# Altium PCB shop roaster psu module board 1.PcbDoc
Units mm, origin at the board's own origin, x right, y up, seen from the top; angles counter-clockwise.
Board outline 152.4 x 101.6 mm, 2 copper layers (Top Layer, Bottom Layer); 21 components, 11 nets, 86 pads, 4 vias.
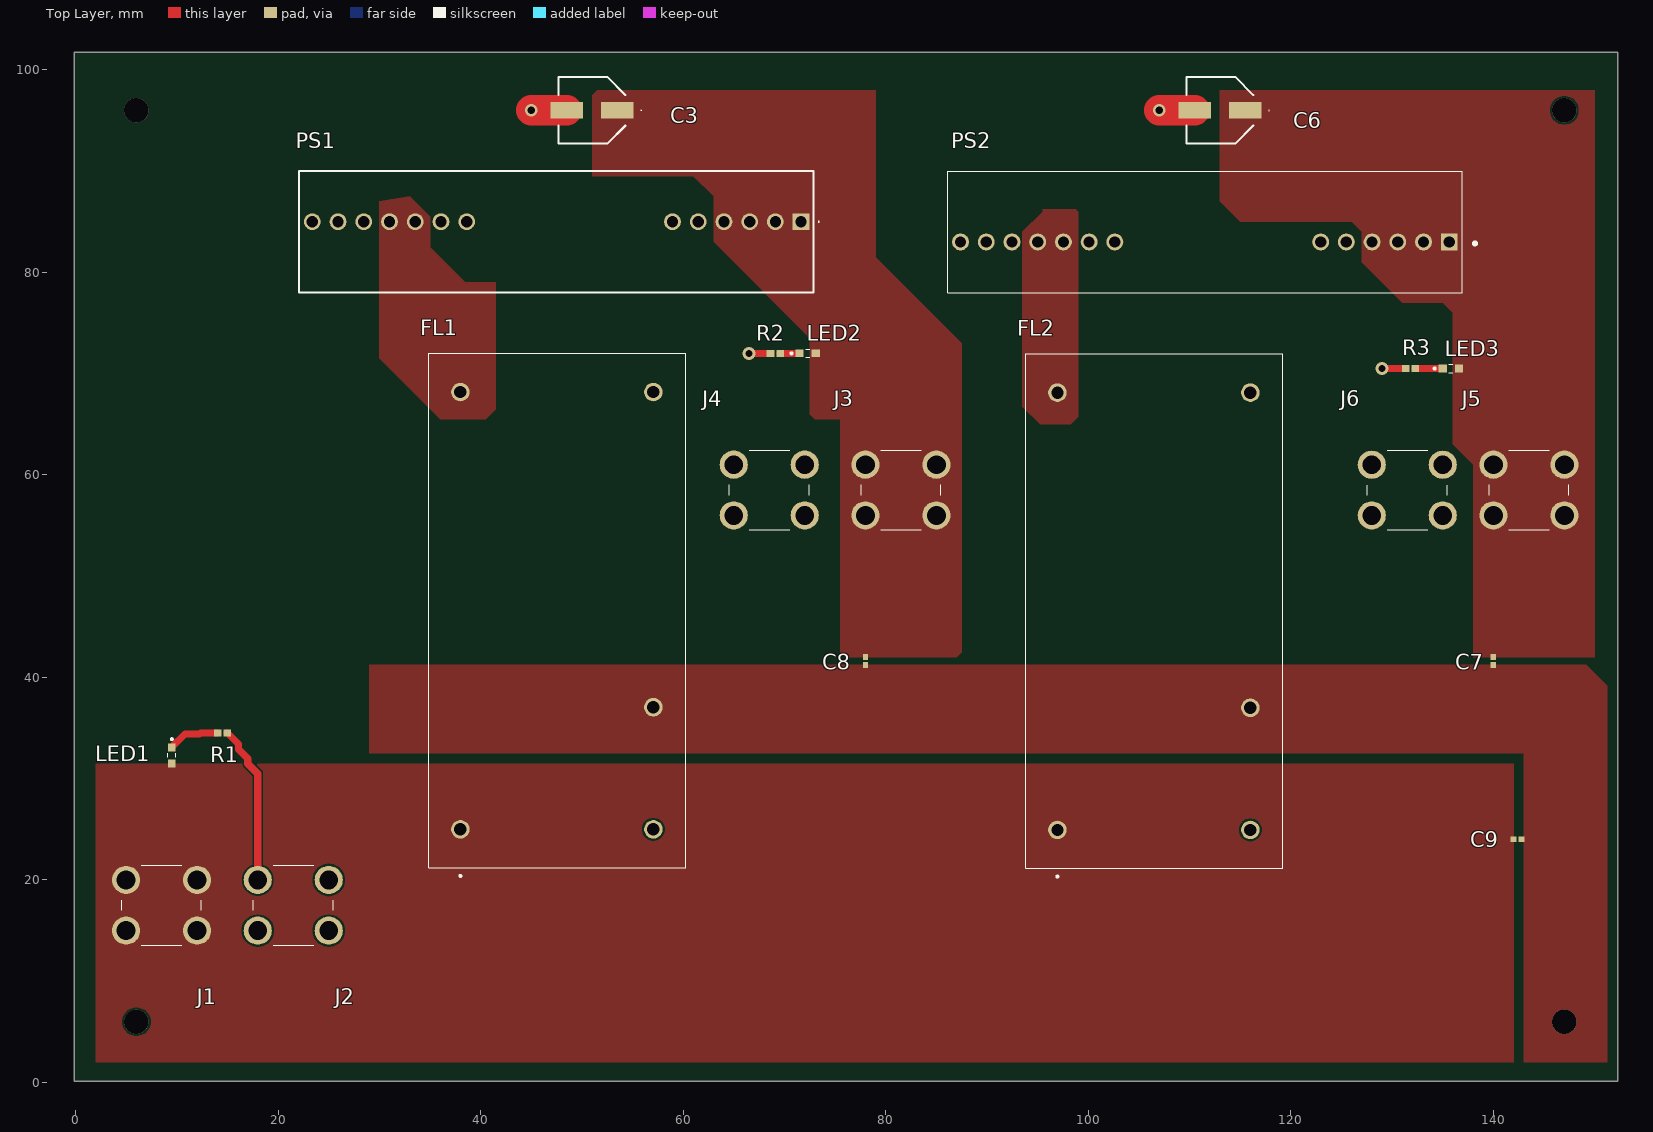
[diagram p0: Top Layer view]
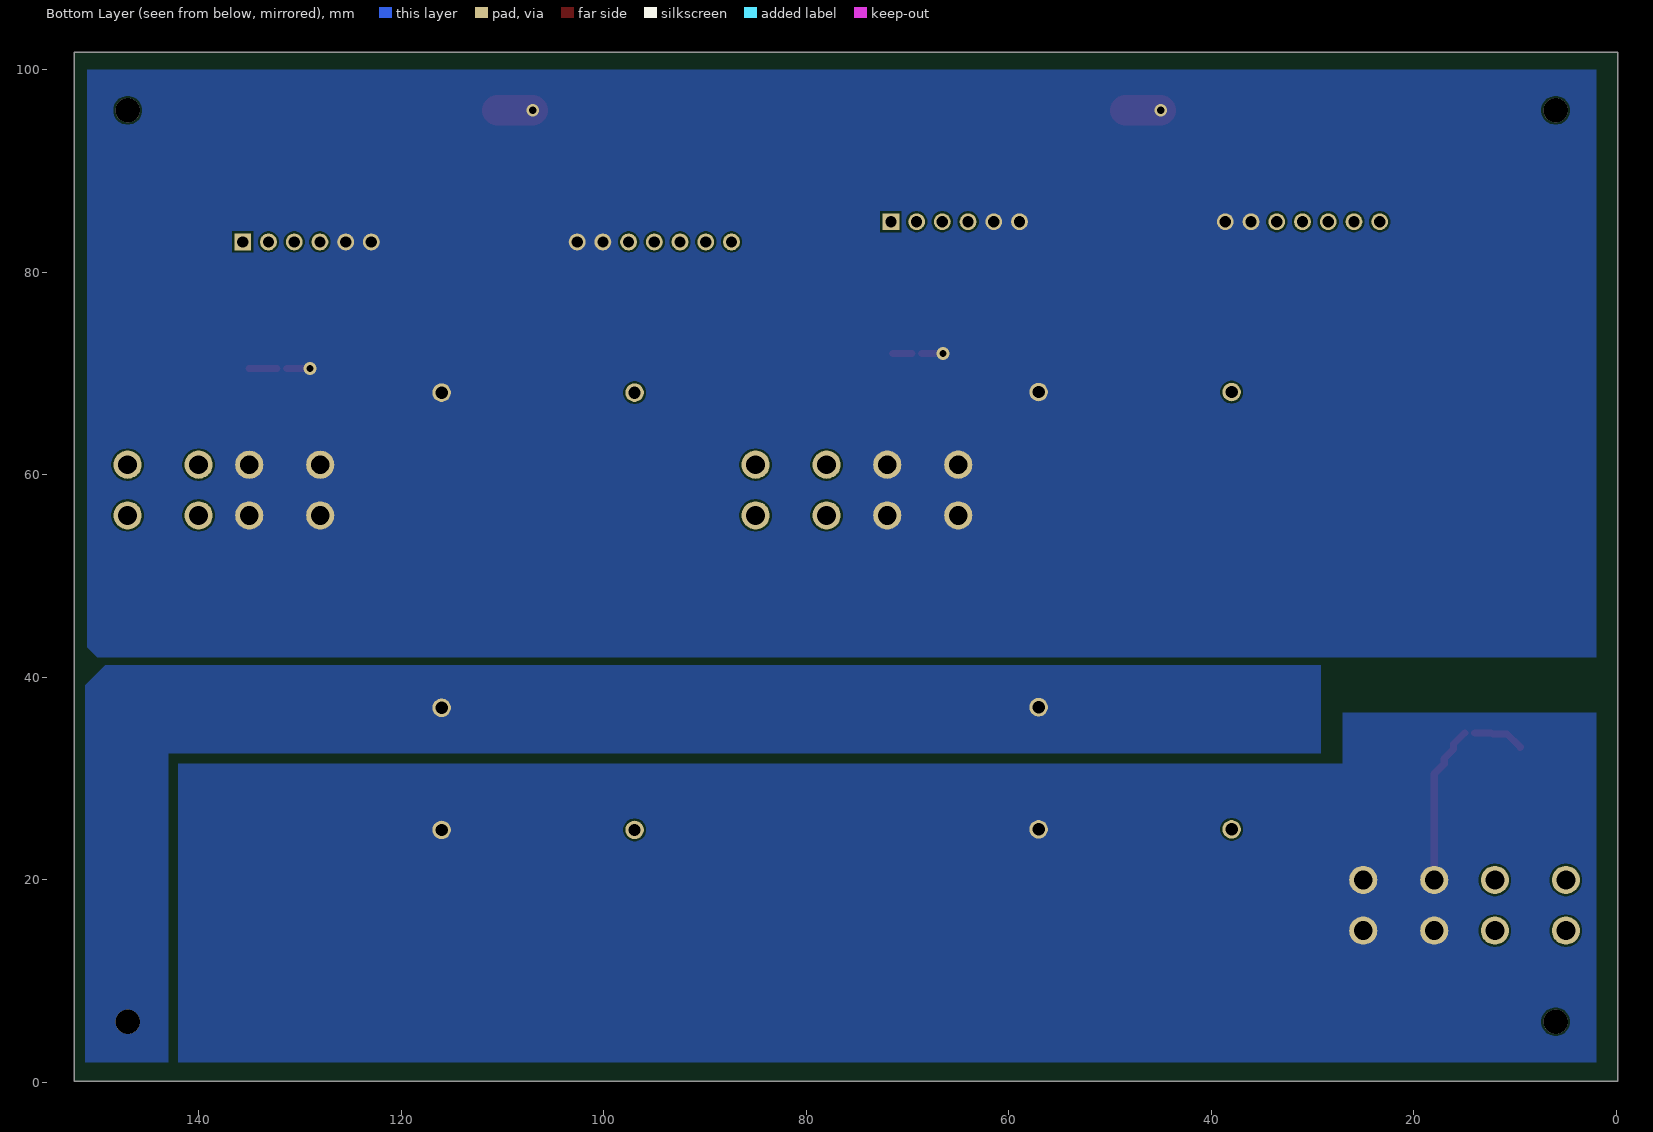
[diagram p1: Bottom Layer view, seen from below]
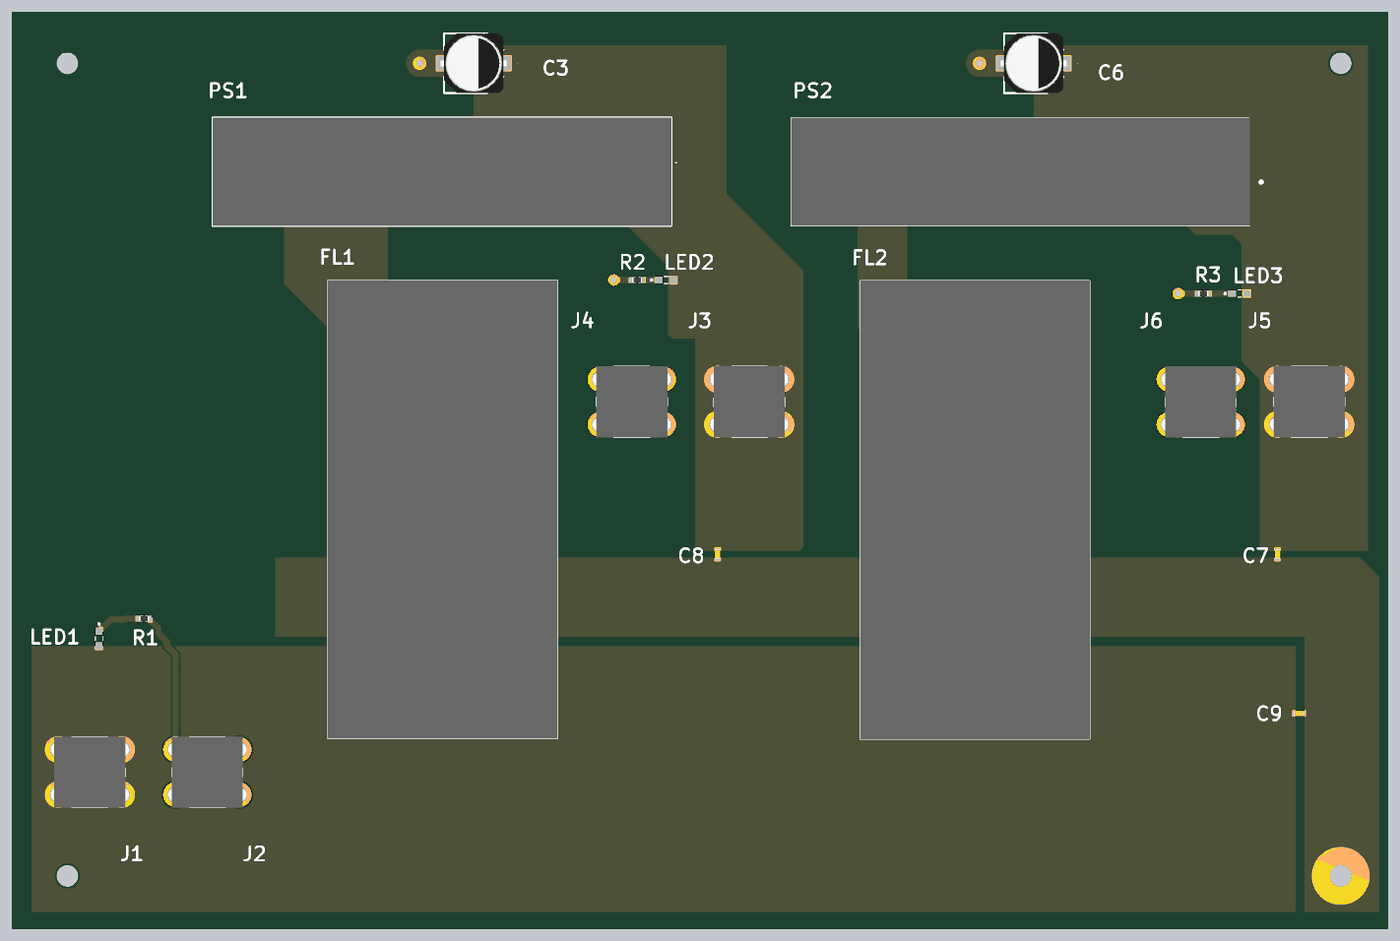
[diagram p2: 3D render of the assembled board from above, using the file's embedded part models]

## Layer stack, top to bottom
Top Solder: solder mask 0.0102, Solder Resist, Dk 3.5
Top Layer: signal copper 0.0356
Dielectric 1: dielectric 0.32, FR-4, Dk 4.8
Bottom Layer: signal copper 0.0356
Bottom Solder: solder mask 0.0102, Solder Resist, Dk 3.5

## Board outline
-0.127,0.127 152.273,0.127 152.273,101.727 -0.127,101.727

## Design rules (kind name [scope] priority, off if disabled: settings)
Clearance [All] p1: gap=0.2 ignorepadtopadclearanceinfootprint=FALSE
PlaneConnect [All] p1: planeconnectstyle=Direct reliefexpansion=0.508 reliefentries=4 reliefconductorwidth=0.254 reliefairgap=0.254
PolygonConnect [All] p1: connectstyle=Direct reliefconductorwidth=0.254 reliefentries=4 polygonreliefangle="90 Angle" airgapwidth=0.254
RoutingVias [All] p1: holewidth=0.711 width=1.27 viastyle="Through Hole" minholewidth=0.711 minwidth=1.27 maxholewidth=0.711 maxwidth=1.27
SolderMaskExpansion [All] p1: expansion=0.102 istentingtop=FALSE
Width [All] p1: maxlimit=5 minlimit=0.5 preferedwidth=3 minimp=50.000000 maximp=50.000000 favimp=50.000000
29 further rules are at their usual default settings.

## Components (designator, comment, footprint, x,y, rotation, side; value= is the part's Value field where it differs from the comment)
C3 "EEE-FK1J220XP" EEE0JA331XP 51,96 r180 top
C6 "EEE-FK1J220XP" EEE0JA331XP 113,96 r180 top
C7 "Capacitor 0.1 uF +/- 5% 16 V 0402" CAPC1005X56X25LL10T15 140,41.61 r90 top value=100nF
C8 "Capacitor 0.1 uF +/- 5% 16 V 0402" CAPC1005X56X25LL10T15 78,41.61 r90 top value=100nF
C9 "Capacitor 0.1 uF +/- 5% 16 V 0402" CAPC1005X56X25LL10T15 142.39,24 r180 top value=100nF
FL1 "VFM-10A" VFM10A 38,25 r90 top
FL2 "VFM-10A" VFM10A 96.95,24.94 r90 top
J1 "8191-2" 81912 12,20.004 r270 top
J2 "8191-2" 81912 25,20.004 r270 top
J3 "8191-2" 81912 77.99,56 r90 top
J4 "8191-2" 81912 64.99,56 r90 top
J5 "8191-2" 81912 140,56 r90 top
J6 "8191-2" 81912 127.99,55.996 r90 top
LED1 "150060RS55040" 150060RS55040 9.5,32.3 r270 top
LED2 "150060RS55040" 150060RS55040 72.29,72 r0 top
LED3 "150060RS55040" 150060RS55040 135.8,70.5 r0 top
PS1 "NID100-24" NID10024 71.64,85 r180 top
PS2 "NID100-12" NID10012 135.64,83 r180 top
R1 "Resistor 15k +/-1% 0402 63 mW" RESC1005X40X25ML10T10 14.5,34.5 r180 top value=15k
R2 "Resistor 15k +/-1% 0402 63 mW" RESC1005X40X25ML10T10 69.09,72 r0 top value=15k
R3 "Resistor 15k +/-1% 0402 63 mW" RESC1005X40X25ML10T10 131.8,70.5 r0 top value=15k

## Footprints (in the part's own frame and the unit in brackets; to place one, negate y for a bottom-side part, rotate by r counter-clockwise, add the part's x,y. Pads: shape width x height; smd on the part's side, far side on the other; paste and mask are expansions set on the pad)
81912 [mil]
  round 109.49 hole 73: 1(0,0) 2(197.01,0) 3(0,-275.99) 4(197.01,-275.99)
  silkscreen extent -56,-293 254,17, body extent -394,-133 394,133, height 228
150060RS55040 [mm]
  rect 0.8x0.75 smd: 1(-0.8,0) 2(0.8,0)
  silkscreen extent -1.7,-0.4 0.2,0.4
CAPC1005X56X25LL10T15 [mm] "Chip Capacitor, 2-Leads, Body 1.10x0.60mm, IPC High Density"
  rect 0.58x0.54 smd: 1(-0.39,0) 2(0.39,0)
  body extent -0.55,-0.3 0.55,0.3, height 0.56
EEE0JA331XP [mm]
  rect 3.2x1.6 smd: 1(-2.5,0) 2(2.5,0)
  silkscreen extent -4.88,-3.3 3.3,3.3, body extent -3.65,-3.3 3.65,3.3, height 7.7
NID10012 [mm]
  rect 1.665x1.665 hole 1.11: 1(0,0)
  round 1.665 hole 1.11: 2(2.54,0) 3(5.08,0) 4(7.62,0) 5(10.16,0) 6(12.7,0) 7(33.02,0) 8(35.56,0) 9(38.1,0) 10(40.64,0) 11(43.18,0) 12(45.72,0) 13(48.26,0)
  silkscreen extent -2.69,-7 49.53,5, body extent -1.27,-7 49.53,5, height 27.6
NID10024 [mm]
  rect 1.665x1.665 hole 1.11: 1(0,0)
  round 1.665 hole 1.11: 2(2.54,0) 3(5.08,0) 4(7.62,0) 5(10.16,0) 6(12.7,0) 7(33.02,0) 8(35.56,0) 9(38.1,0) 10(40.64,0) 11(43.18,0) 12(45.72,0) 13(48.26,0)
  silkscreen extent -1.8,-5 49.56,7, body extent -1.24,-5 49.56,7, height 27.6
RESC1005X40X25ML10T10 [mm] "Chip Resistor, 2-Leads, Body 1.1x0.6mm, IPC Low Density"
  rect 0.75x0.7 smd: 1(-0.475,0) 2(0.475,0)
  body extent -0.55,-0.27 0.55,0.28, height 0.4
VFM10A [mm]
  round 1.83 hole 1.22: 1(0,0) 2(0,-19.05) 3(43.18,0) 4(43.18,-19.05) 5(12.06,-19.05)
  silkscreen extent -4.7,-22.25 47,3.15, body extent -3.8,-22.25 47,3.15, height 11.8

## Part data
C3 C6: "Capacitor Polarised", Manufacturer_Name=Panasonic, Mouser Part Number=667-EEE-FK1J220XP, Arrow Part Number=EEE-FK1J220XP, Arrow Price/Stock=https://www.arrow.com/en/products/eeefk1j220xp/panasonic, Datasheet Link=http://industrial.panasonic.com/cdbs/www-data/pdf/RDE0000/ABA0000C1181.pdf, Height=7.8mm, Manufacturer_Part_Number=EEE-FK1J220XP, Mouser Price/Stock=https://www.mouser.co.uk/ProductDetail/Panasonic/EEE-FK1J220XP?qs=qE6bgDGEOCtReXDhLMMdtw%3D%3D
C7 C8 C9: library part CMP-001-00001-6, "Chip Capacitor, 0.1 uF, +/- 5%, 16 V, 0402 (1005 Metric)", Capacitor Type=Ceramic, Case/Package=0402, Max Operating Temperature=125°C, Min Operating Temperature=-55°C, Tolerance=5%, Voltage Rating=16V, Mounting Technology=SM, Pins=2, ROHS COMPLIANT=True
FL1 FL2: library part CMP-002-000003-1, "Power Line Filters 0-75Vin 10A DC EMI Filter", Manufacturer_Name="CUI Inc.", Mouser Part Number=490-VFM-10A, Arrow Part Number=VFM-10A, Arrow Price/Stock=https://www.arrow.com/en/products/vfm-10a/cui-inc, Datasheet Link=https://www.cui.com/product/resource/vfm-xx.pdf, Design Item ID=VFM-10A, Height=11.7mm, Manufacturer_Part_Number=VFM-10A, Mouser Price/Stock=https://www.mouser.co.uk/ProductDetail/CUI-Inc/VFM-10A?qs=WyjlAZoYn52c0yYVx%252BhHOQ%3D%3D, Source=SamacSys.SchLib
J1 J2 J3 J4 J5 J6: library part CMP-002-000000-1, "Keystone, Brass Screw Terminal, 22  14 AWG, 15A", Manufacturer_Name="Keystone Electronics", Mouser Part Number=534-8191-2, Design Item ID=8191-2, Geometry.Height=11.176mm, Manufacturer_Part_Number=8191-2, Mouser Price/Stock=https://www.mouser.co.uk/ProductDetail/Keystone-Electronics/8191-2?qs=zBlGwAMnvtcLi4%252BTp6EI2A%3D%3D, Source=8191-2.SchLib
LED1 LED2 LED3: "LED", Manufacturer_Name="Wurth Elektronik", Mouser Part Number=710-150060RS55040, Datasheet Link=http://katalog.we-online.de/led/datasheet/150060RS55040.pdf, Height=0mm, Manufacturer_Part_Number=150060RS55040, Mouser Price/Stock=https://www.mouser.co.uk/ProductDetail/Wurth-Elektronik/150060RS55040?qs=8Aam6%252B7C6HHnMZFlrlTntA%3D%3D
PS1: "Power Supply", Manufacturer_Name="Mean Well", Mouser Part Number=709-NID100-24, Arrow Part Number=NID100-24, Arrow Price/Stock=https://www.arrow.com/en/products/nid100-24/mean-well-enterprises?region=nac, Datasheet Link=https://www.meanwellusa.com/webapp/product/search.aspx?prod=NID100#1, Height=27.5mm, Manufacturer_Part_Number=NID100-24, Mouser Price/Stock=https://www.mouser.co.uk/ProductDetail/MEAN-WELL/NID100-24?qs=u16ybLDytRYj3KEXttNRbg%3D%3D
PS2: "Power Supply", Manufacturer_Name="Mean Well", Mouser Part Number=709-NID100-12, Arrow Part Number=NID100-12, Arrow Price/Stock=https://www.arrow.com/en/products/nid100-12/mean-well-enterprises?region=nac, Datasheet Link=https://www.meanwell-web.com/content/files/pdfs/productPdfs/MW/NID100/NID100-spec.pdf, Height=27.5mm, Manufacturer_Part_Number=NID100-12, Mouser Price/Stock=https://www.mouser.co.uk/ProductDetail/MEAN-WELL/NID100-12?qs=u16ybLDytRakdcW8%2FWhQZg%3D%3D
R1 R2 R3: library part CMP-009-00026-5, "Chip Resistor, 15 KOhm, +/- 1%, 0.063 W, -55 to 155 degC, 0402 (1005 Metric)", Case/Package=0402, Max Operating Temperature=155°C, Min Operating Temperature=-55°C, Power=63mW, Tolerance=1%, Mounting Technology=SM, Pins=2, ROHS COMPLIANT=True

## Free pads (board coordinates)
  round 2.4 hole 2.4 unplated mask+0: MH(6,6) MH(6,96) MH(147,96)
  round 2.4 hole 2.4 mask+2: MH(147,6)

## Via types
v1: diameter 1.27, hole 0.711, Top Layer to Bottom Layer, 4 vias

## Nets (pads, with @x,y where several pads share a name; then routed paths per layer and width w, separated by ;. In a path a pad name is that pad's centre, name@x,y a point inside that pad or via, vN(x,y) a via of type N, cw(c..) or ccw(c..) an arc to the next point about the centre after c; other vN are vias at no path point)
5Vdc: C6.1 C7.2 J5.1 J5.2 J5.3 J5.4 LED3.2 PS2.1 PS2.2 PS2.3 PS2.4
5Vin: FL2.3 PS2.9 PS2.10
24Vdc: C3.1 C8.2 J3.1 J3.2 J3.3 J3.4 LED2.2 PS1.1 PS1.2 PS1.3 PS1.4
24Vin: FL1.3 PS1.9 PS1.10
48Vdc: C9.2 FL1.1 FL2.1 J1.1 J1.2 J1.3 J1.4 LED1.2
48VRet: FL1.2 FL2.2 J2.1 J2.2 J2.3 J2.4 R1.1 | length 15.8
  Top Layer w0.7: R1.1 15,34.5 16.09,33.41 16.09,32.91 16.999,32.001 16.999,31.476 17.99,30.485 17.99,20.296 J2.3
Earth: C7.1 C8.1 C9.1 FL1.5 FL2.5 pad.MH@147,6
GND: C3.2 C6.2 FL1.4 FL2.4 J4.1 J4.2 J4.3 J4.4 J6.1 J6.2 J6.3 J6.4 PS1.5 PS1.6 PS1.7 PS1.8 PS2.5 PS2.6 PS2.7 PS2.8 R2.1 R3.1 | length 11.4
  Top Layer w0.7: v1(66.5,72) 68.185,72 R2.1 ; v1(129,70.5) 130.685,70.5 R3.1
  Top Layer w3: v1(45,96) C3.2 ; v1(107,96) C6.2
NetLED1_1: LED1.1 R1.2 | length 5.1
  Top Layer w0.7: LED1.1 9.5,33.125 10.788,34.413 12.25,34.413 12.337,34.5 R1.2
NetLED2_1: LED2.1 R2.2 | length 1.9
  Top Layer w0.7: R2.2 LED2.1
NetLED3_1: LED3.1 R3.2 | length 2.7
  Top Layer w0.7: R3.2 LED3.1
pads on no net: PS1.11 PS1.12 PS1.13 PS2.11 PS2.12 PS2.13

## Polygon pours and split planes (outlines as drawn)
48VRet on Bottom Layer "24_iso return" (solid, pour order 1): 2,36.5 27,36.5 27,31.459 108.572,31.459 142,31.459 142,2 2,2
GND on Bottom Layer "24_iso return" (solid, pour order 4): 150,42 151,43 151,100 2,100 2,42
Earth on Bottom Layer "24_iso return" (solid, pour order 6): 29.197,41.212 29.197,32.5 143,32.5 143,2 151.197,2 151.197,39.212 149.197,41.212
48Vdc on Top Layer "24_iso return" (solid, pour order 0): 62.664,31.459 2,31.459 2,2 142,2 142,31.459
5Vdc on Top Layer "24_iso return" (solid, pour order 5): 113,98 113,87 115,85 126,85 127,84 127,81 131,77 135,77 136,76 136,63 138,61 138,42 150,42 150,98
24Vin on Top Layer "24_iso return" (solid, pour order 9): 30,87 30,71.5 36,65.5 40.5,65.5 41.5,66.5 41.5,79 38.5,79 35,82.5 35,85.5 33,87.5
24Vdc on Top Layer "24_iso return" (solid, pour order 8): 75.5,42.5 76,42 87,42 87.5,42.5 87.5,73 79,81.5 79,98 51.5,98 51,97.5 51,89.5 61,89.5 63,87.5 63,83 72.5,73.5 72.5,66 73,65.5 75.5,65.5
5Vin on Top Layer "24_iso return" (solid, pour order 7): 93.5,84 95.5,86 95.5,86.25 98.75,86.25 99,86 99,65.75 98.25,65 95.25,65 93.5,66.75
Earth on Top Layer "24_iso return" (solid, pour order 2): 29,41.25 29,32.5 143,32.5 143,2 151.25,2 151.25,39.159 149.159,41.25